# Altium PCB PCB.PcbDoc
Units mil, origin at the board's own origin, x right, y up, seen from the top; angles counter-clockwise.
Board outline 13140 x 5475 mil, 2 copper layers (Top Layer, Bottom Layer); 31 components, 31 nets, 145 pads, 0 vias.
Unrouted connection lines stored in the file: 79.
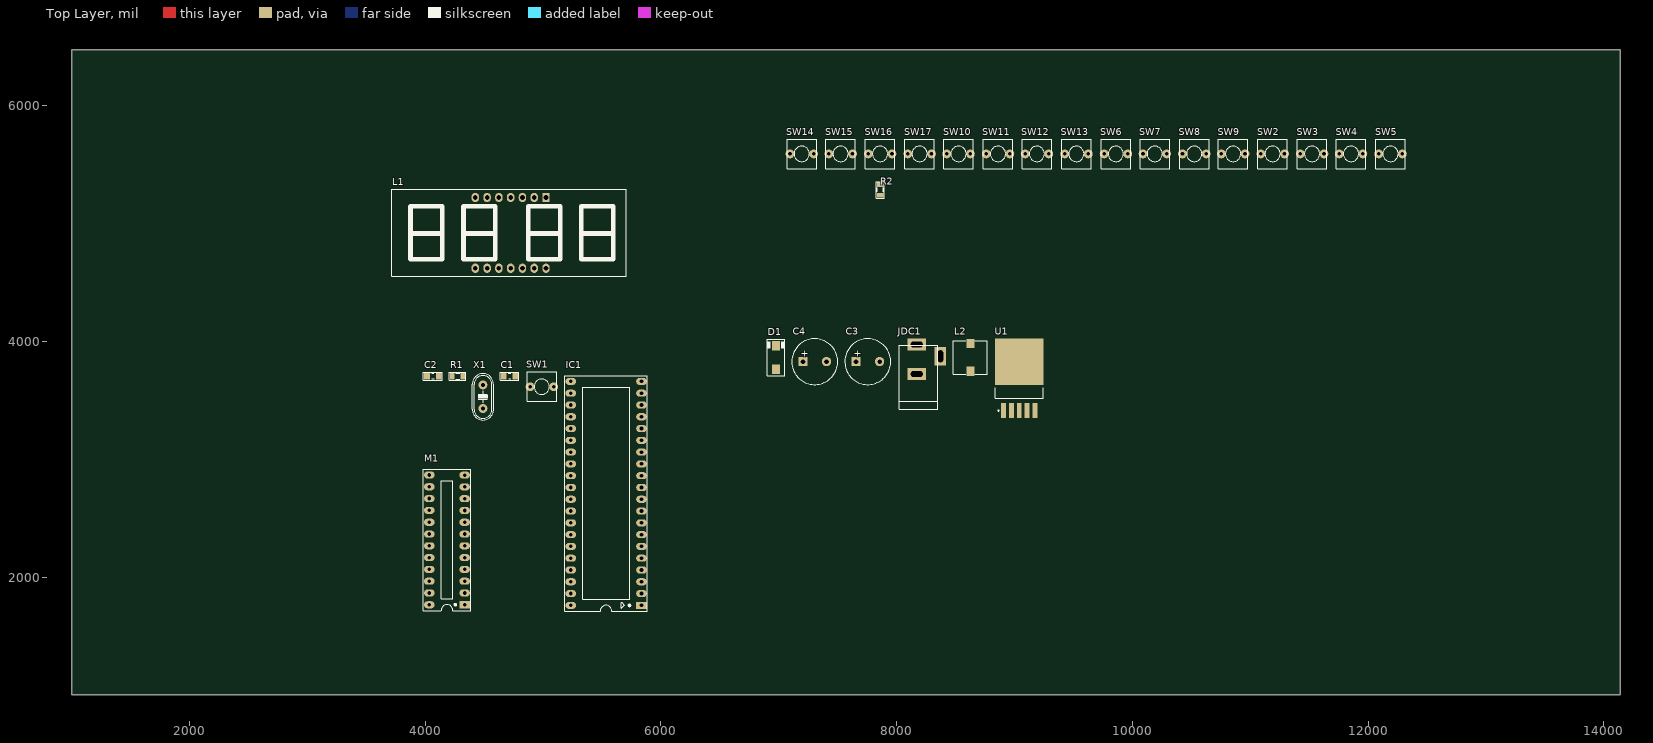
[diagram p0: Top Layer view]
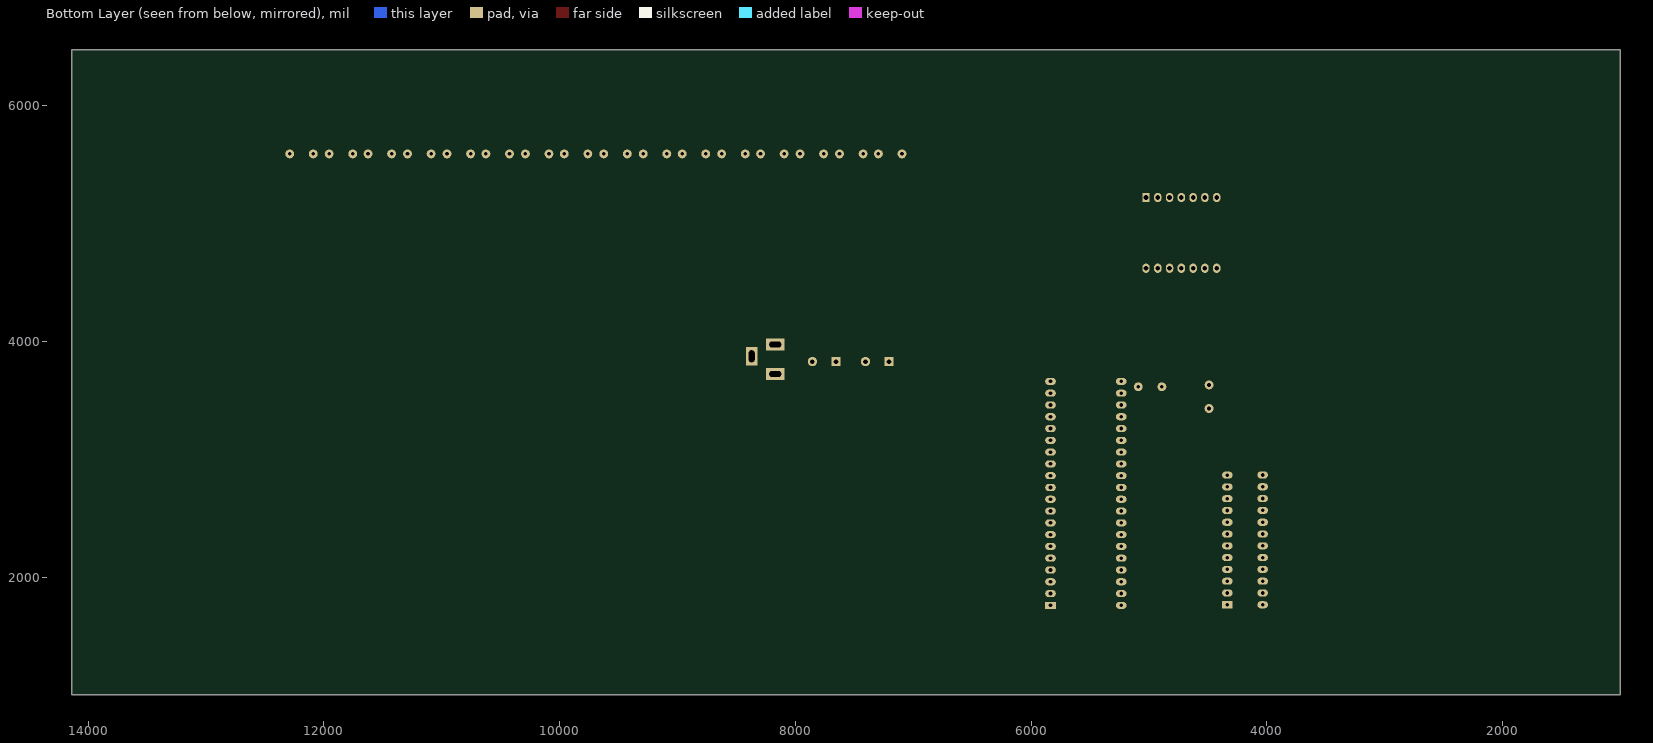
[diagram p1: Bottom Layer view, seen from below]

## Layer stack, top to bottom
Top Solder: solder mask 0.4, Solder Resist, Dk 3.5
Top Layer: signal copper 1.4
Dielectric 1: dielectric 12.6, FR-4, Dk 4.8
Bottom Layer: signal copper 1.4
Bottom Solder: solder mask 0.4, Solder Resist, Dk 3.5

## Board outline
1000,1000 14140,1000 14140,6475 1000,6475

## Design rules (kind name [scope] priority, off if disabled: settings)
Clearance [All] p1: gap=10 ignorepadtopadclearanceinfootprint=FALSE except(0: Arc-Hole Track-Hole SMDPad-Hole THPad-Hole Via-Hole Fill-Hole Poly-Hole Region-Hole Text-Hole)
PolygonConnect [All] p1: connectstyle=Relief reliefconductorwidth=10 reliefentries=4 polygonreliefangle="90 Angle" airgapwidth=10
RoutingVias [All] p1: holewidth=28 width=50 viastyle="Through Hole" minholewidth=28 minwidth=50 maxholewidth=28 maxwidth=50
SolderMaskExpansion [All] p1: expansion=4
Width [All] p1: maxlimit=40 minlimit=20 preferedwidth=30
30 further rules are at their usual default settings.

## Classes and differential pairs
component class 3: C3 C4 D1 JDC1 L2 U1
component class 2: L1 M1 R2
component class 1: C1 C2 IC1 R1 SW1 X1
component class 0: SW2 SW3 SW4 SW5 SW6 SW7 SW8 SW9 SW10 SW11 SW12 SW13 SW14 SW15 SW16 SW17

## Components (designator, comment, footprint, x,y, rotation, side; value= is the part's Value field where it differs from the comment)
C1 "22pF" CAP_0805 4715,3705 r0 top value=33p
C2 "22pF" CAP_0805 4065,3705 r0 top value=33p
C3 "470uF" C10mm 7755,3828.11 r0 top
C4 "220uF" C10mm 7305,3828.11 r0 top
D1 "1N5822" SMA 6975,3863.11 r90 top value="Diode c?m 1N5408"
IC1 "AT89C52" DIP40/W0.6 5835,1760 r90 top
JDC1 "Jac DC" DC-IN 8270,3848.11 r90 top
L1 "Led 7 Seg 4 digit - Anode" LED7SEG-4-0.56-RG 4705,4925 r180 top
L2 "150mH" L-SMD-M-7.3x4.5 8625,3863.11 r0 top value="150 mH"
M1 "MAX7219ENG" DIP24/W0.3 4335,1765 r90 top
R1 "100k" RES-SMD-0805 4275,3705 r0 top
R2 "10k" RES-SMD-0805 7860,5285 r90 top
SW1 "SW" SW2 4890,3615 r0 top value="SW chip 2 pin"
SW2 "SW" SW2 11090,5590 r0 top value="SW chip 2 pin"
SW3 "SW" SW2 11425,5590 r0 top value="SW chip 2 pin"
SW4 "SW" SW2 11755,5590 r0 top value="SW chip 2 pin"
SW5 "SW" SW2 12090,5590 r0 top value="SW chip 2 pin"
SW6 "SW" SW2 9760,5590 r0 top value="SW chip 2 pin"
SW7 "SW" SW2 10090,5590 r0 top value="SW chip 2 pin"
SW8 "SW" SW2 10425,5590 r0 top value="SW chip 2 pin"
SW9 "SW" SW2 10755,5590 r0 top value="SW chip 2 pin"
SW10 "SW" SW2 8425,5590 r0 top value="SW chip 2 pin"
SW11 "SW" SW2 8760,5590 r0 top value="SW chip 2 pin"
SW12 "SW" SW2 9090,5590 r0 top value="SW chip 2 pin"
SW13 "SW" SW2 9425,5590 r0 top value="SW chip 2 pin"
SW14 "SW" SW2 7095,5590 r0 top value="SW chip 2 pin"
SW15 "SW" SW2 7425,5590 r0 top value="SW chip 2 pin"
SW16 "SW" SW2 7760,5590 r0 top value="SW chip 2 pin"
SW17 "SW" SW2 8095,5590 r0 top value="SW chip 2 pin"
U1 "LM2976" TO-263 9040,3648.11 r90 top
X1 "12MHz" XT2 4490,3530 r90 top value=4Mhz

## Footprints (in the part's own frame and the unit in brackets; to place one, negate y for a bottom-side part, rotate by r counter-clockwise, add the part's x,y. Pads: shape width x height; smd on the part's side, far side on the other; paste and mask are expansions set on the pad)
C10mm [mm]
  rect 2x2 hole 1: 1(-2.54,0)
  round 2 hole 1: 2(2.54,0)
  silkscreen extent -4.95,-4.96 4.93,4.92, body extent -5,-5 4.97,5, height 20.01
CAP_0805 [mm]
  rect 1.2x1.4 smd: 1(-1.27,-0.025) 2(1.27,-0.025)
  silkscreen extent -2.03,-0.91 2.03,0.86, body extent -1.01,-0.66 1.01,0.61, height 0.61
DC-IN [mil] "Jac DC input"
  rect 100x160 hole 50 slot 100 at 90 deg: 1(125,100) 2(-125,100)
  rect 160x100 hole 50 slot 100 at 0 deg: 3(25,-100)
  silkscreen extent -425,-80 120,250, body extent -410,-105 134,269, height 434
DIP24/W0.3 [mil] "DIP24/W.300, Pin to pin 100mil"
  rect 60x90 hole 31: 1(0,0)
  oval 60x90 hole 31: 2(100,0) 3(200,0) 4(300,0) 5(400,0) 6(500,0) 7(600,0) 8(700,0) 9(800,0) 10(900,0) 11(1000,0) 12(1100,0) 13(1101,300) 14(1001,300) 15(901,300) 16(801,300) 17(700,300) 18(600,300) 19(500,300) 20(400,300) 21(300,300) 22(200,300) 23(100,300) 24(0,300)
  silkscreen extent -50,-50 1150,350, body extent -89,-3 1181,307, height 200
DIP40/W0.6 [mil] "40 PIN, W 600mil, Pin to pin 100mil"
  rect 60x90 hole 31: 1(0,0)
  oval 60x90 hole 31: 2(100,0) 3(200,0) 4(300,0) 5(400,0) 6(500,0) 7(600,0) 8(700,0) 9(800,0) 10(900,0) 11(1000,0) 12(1100,0) 13(1200,0) 14(1300,0) 15(1400,0) 16(1500,0) 17(1600,0) 18(1700,0) 19(1800,0) 20(1900,0) 21(1900,600) 22(1800,600) 23(1700,600) 24(1600,600) 25(1500,600) 26(1400,600) 27(1300,600) 28(1200,600) 29(1100,600) 30(1000,600) 31(900,600) 32(800,600) 33(700,600) 34(600,600) 35(500,600) 36(400,600) 37(300,600) 38(200,600) 39(100,600) 40(0,600)
  silkscreen extent -50,-50 1950,650, body extent -82,-10 1982,600, height 224
L-SMD-M-7.3x4.5 [mm] "WE-PDA SMD Shielded Power Inductor, 7345"
  rect 1.7x2 smd: 1(0,3) 2(0,-3)
  silkscreen extent -3.65,-3.65 3.65,3.65, body extent -3.65,-3.65 3.65,3.65, height 4.05
LED7SEG-4-0.56-RG [mil]
  round 60 on Top Overlay: 0(-535,-205) 0(-85,-205) 0(465,-205) 0(915,-205)
  round 118.11 on Top Overlay: 0(-20,155) 0(-20,-95)
  rect 62.99x78.74 hole 39.37: 1(-320,-295)
  oval 62.99x78.74 hole 39.37: 2(-220,-295) 3(-120,-295) 4(-20,-295) 5(80,-295) 6(180,-295) 7(280,-295) 8(280,305) 9(180,305) 10(80,305) 11(-20,305) 12(-120,305) 13(-220,305) 14(-320,305)
  silkscreen extent -1000,-365 990,375, body extent -995,-370 985,378, height 565
RES-SMD-0805 [mil]
  rect 39.37x55 smd: 1(-45,0) 2(45,0)
  silkscreen extent -70,-34 70,33, body extent -39,-25 39,25, height 31
SMA [mm]
  rect 2x1.7 smd: 1(-2.544,0) 2(2.544,0)
  silkscreen extent -3.94,-1.9 3.94,1.91, body extent -2.87,-1.4 2.87,1.4, height 2.29
SW2 [mil] "SW button 2pin, 250x 250 mil"
  round 75 hole 31: 1(0,0) 2(200,0)
  silkscreen extent -25,-125 225,125
TO-263 [mm]
  rect 3.2x1.05 smd: 1(-6,3.4) 2(-6,1.7) 3(-6,0) 4(-6,-1.7) 5(-6,-3.4)
  rect 10x10.45 smd: 6(4.5,0)
  silkscreen extent -6.12,-5.2 -1.1,5.2, body extent -6.58,-5.2 7.57,5.2, height 4.65
XT2 [mil] "Footpin for Crystal 2 pin"
  round 75 hole 34: 1(-100,0) 2(100,0)
  silkscreen extent -198,-90 195,90, body extent -233,-93 213,90, height 138

## Part data
C1 C2: library part CapSMD, "Capacitor", LatestRevisionDate=17-Jul-2002, LatestRevisionNote="Re-released for DXP Platform.", PackageReference=RAD-0.3, Published=8-Jun-2000, Publisher="Altium Limited"
C3 C4: library part "Cap Pol", "Polarized Capacitor (Axial)", LatestRevisionDate=17-Jul-2002, LatestRevisionNote="Re-released for DXP Platform.", PackageReference=POLAR0.8, Published=8-Jun-2000, Publisher="Altium Limited"
D1: "Schottky Rectifiers"
IC1: "Atmel AT89C52, 8k Byte Flash Memory , 40 Pin"
JDC1: library part DCIN, "Jac DC input"
L1: library part LED7SEG-4-RG
L2: library part Inductor, "Inductor"
M1: "Serially Interfaced, 8-Digit LED Display Driver", Code_JEDEC=MS-001-AF, ComponentLink1Description="Manufacturer Link", ComponentLink1URL=http://www.maxim-ic.com/, ComponentLink2Description=Datasheet, ComponentLink2URL=http://pdfserv.maxim-ic.com/en/ds/MAX7219-MAX7221.pdf, DatasheetVersion=Jul-1997, LatestRevisionDate=29-May-2009, LatestRevisionNote="Component Body Added.", PackageDescription="DIP, 24-Pin, Row Spacing 7.62 mm, Pitch 2.54 mm", PackageReference=NG24A, PackageVersion=1997, Published=16-Jan-2001, Publisher="Altium Limited"
R1 R2: library part "Resistor - SMD", "Resistor", Manufacturer="Generic Components", Class=Passive, Published=08/06/2000, Publisher="Altium Hobart Technology Centre"
SW1 SW2 SW3 SW4 SW5 SW6 SW7 SW8 SW9 SW10 SW11 SW12 SW13 SW14 SW15 SW16 SW17: library part SW2, "Switch button 2 pin"
U1: library part LM2596, Max Input Voltage="12 V", Max Output Current="3 (6.0 peak) A", Max Output Voltage=mV, Temperature Range="-40 to +125 degC", Category=IC-Power, Min Input Voltage=mV, Min Output Voltage=mV, Mounting Technology="Surface Mount", Status=Unreleased, Supply Voltage=mV
X1: library part XT2, "Crystal For all Crystal 2pin."

## Nets (pads, with @x,y where several pads share a name; then routed paths per layer and width w, separated by ;. In a path a pad name is that pad's centre, name@x,y a point inside that pad or via, vN(x,y) a via of type N, cw(c..) or ccw(c..) an arc to the next point about the centre after c; other vN are vias at no path point)
5V: C4.1 IC1.31 IC1.40 L1.7 L2.2 M1.19 R2.2 SW1.2 U1.4
D0: L1.14 M1.2
D1: L1.11 M1.11
D2: L1.10 M1.6
D3: L1.6 M1.7
GND: C1.1 C2.1 C3.2 C4.2 D1.1 IC1.20 JDC1.2 JDC1.3 L1.8 M1.4 M1.9 R1.1 U1.3 U1.5
NetC1_2: C1.2 IC1.18 X1.2
NetC2_2: C2.2 IC1.19 X1.1
NetC3_1: C3.1 JDC1.1 U1.1
NetD1_2: D1.2 L2.1 U1.2
NetIC1_1: IC1.1 SW2.1 SW6.1 SW10.1 SW14.1
NetIC1_2: IC1.2 SW3.1 SW7.1 SW11.1 SW15.1
NetIC1_3: IC1.3 SW4.1 SW8.1 SW12.1 SW16.1
NetIC1_4: IC1.4 SW5.1 SW9.1 SW13.1 SW17.1
NetIC1_5: IC1.5 SW2.2 SW3.2 SW4.2 SW5.2
NetIC1_6: IC1.6 SW6.2 SW7.2 SW8.2 SW9.2
NetIC1_7: IC1.7 SW10.2 SW11.2 SW12.2 SW13.2
NetIC1_8: IC1.8 SW14.2 SW15.2 SW16.2 SW17.2
NetIC1_9: IC1.9 R1.2 SW1.1
NetIC1_21: IC1.21 M1.13
NetIC1_22: IC1.22 M1.12
NetIC1_23: IC1.23 M1.1
NetL1_1: L1.1 M1.21
NetL1_2: L1.2 M1.23
NetL1_3: L1.3 M1.22
NetL1_4: L1.4 M1.20
NetL1_5: L1.5 M1.17
NetL1_9: L1.9 M1.16
NetL1_12: L1.12 M1.15
NetL1_13: L1.13 M1.14
NetM1_18: M1.18 R2.1
pads on no net: IC1.10 IC1.11 IC1.12 IC1.13 IC1.14 IC1.15 IC1.16 IC1.17 IC1.24 IC1.25 IC1.26 IC1.27 IC1.28 IC1.29 IC1.30 IC1.32 IC1.33 IC1.34 IC1.35 IC1.36 IC1.37 IC1.38 IC1.39 L1.0 M1.3 M1.5 M1.8 M1.10 M1.24 U1.6

## Text inside footprints (layer, text, board x,y; h text height)
C3: Top Overlay "+" at 7635,3868.11 h60
C4: Top Overlay "+" at 7185,3868.11 h60